# Altium PCB board.PcbDoc
Units mm, origin at the board's own origin, x right, y up, seen from the top; angles counter-clockwise.
Board outline 40 x 30 mm, 2 copper layers (Top Layer, Bottom Layer), stack 0.97 mm thick; 50 components, 33 nets, 139 pads, 29 vias.
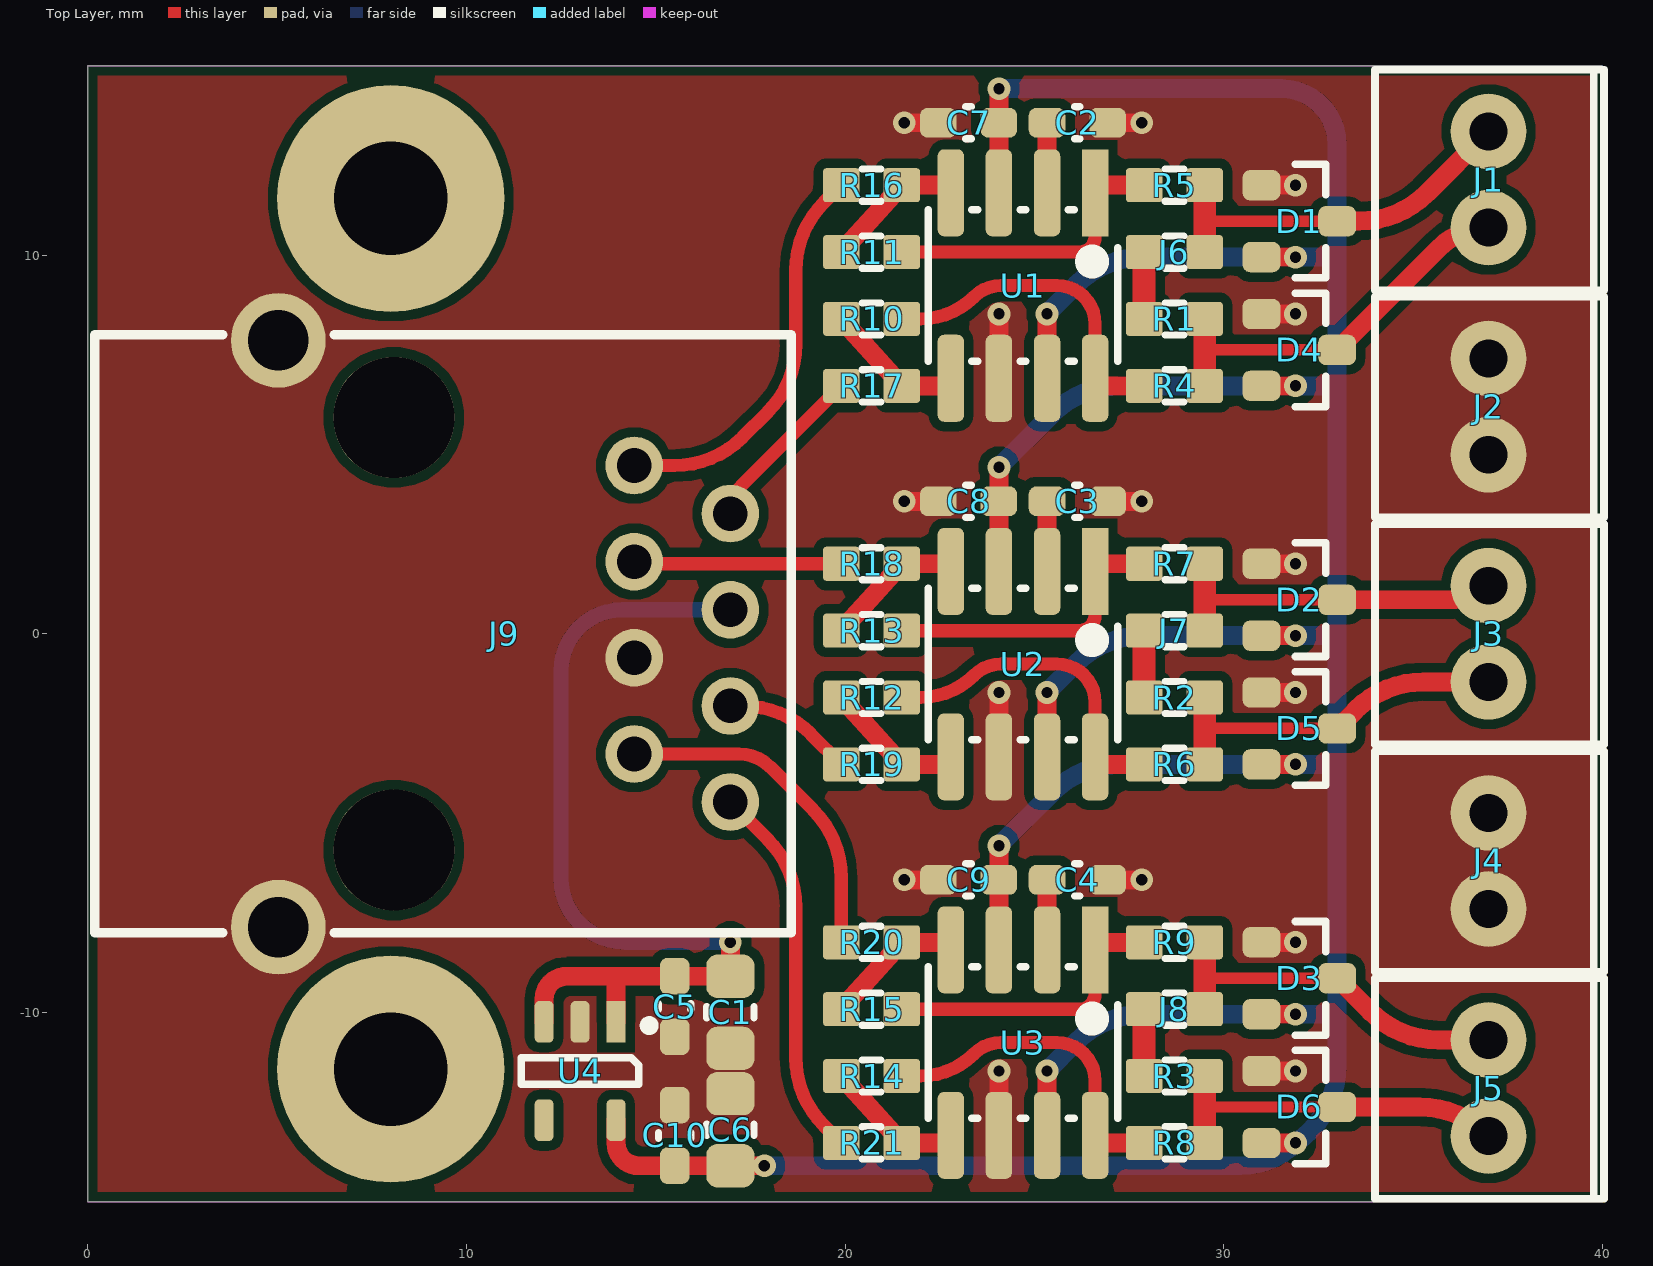
[diagram p0: Top Layer view]
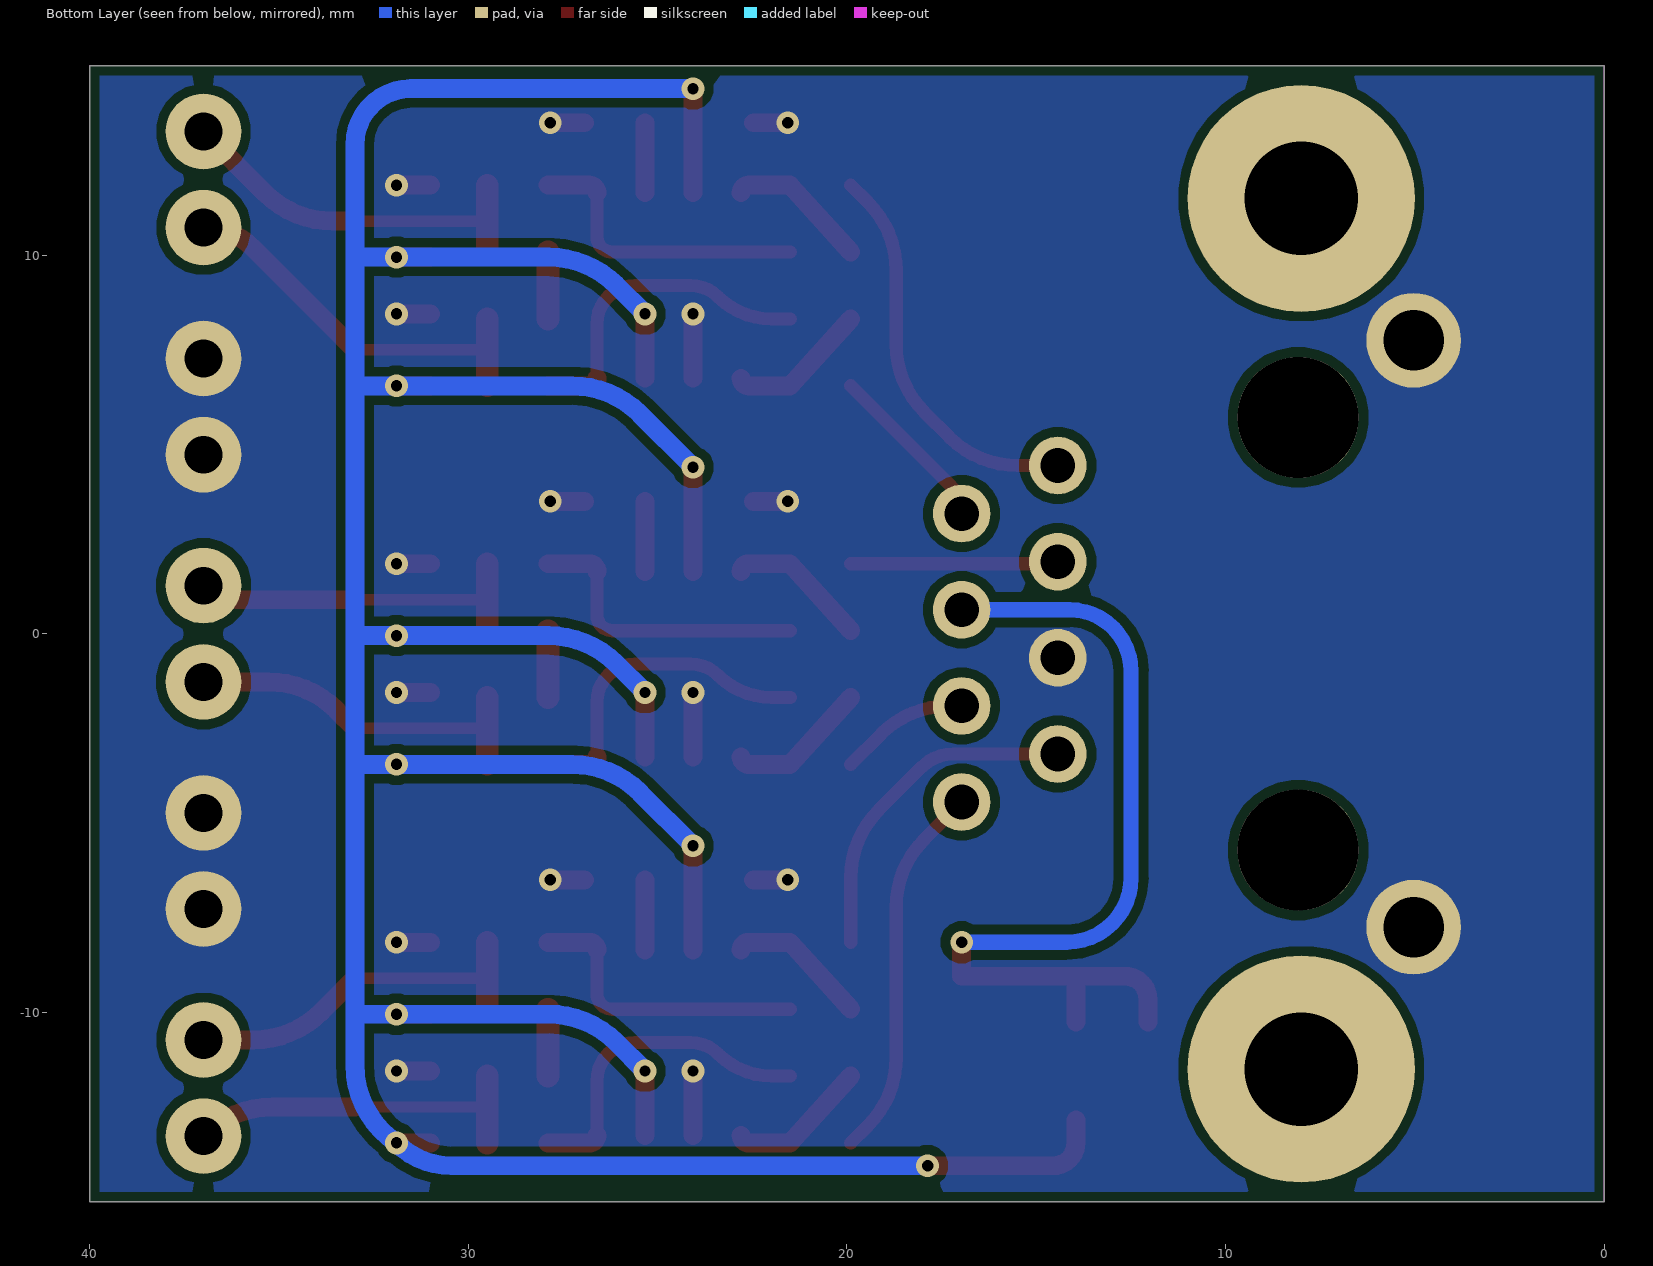
[diagram p1: Bottom Layer view, seen from below]
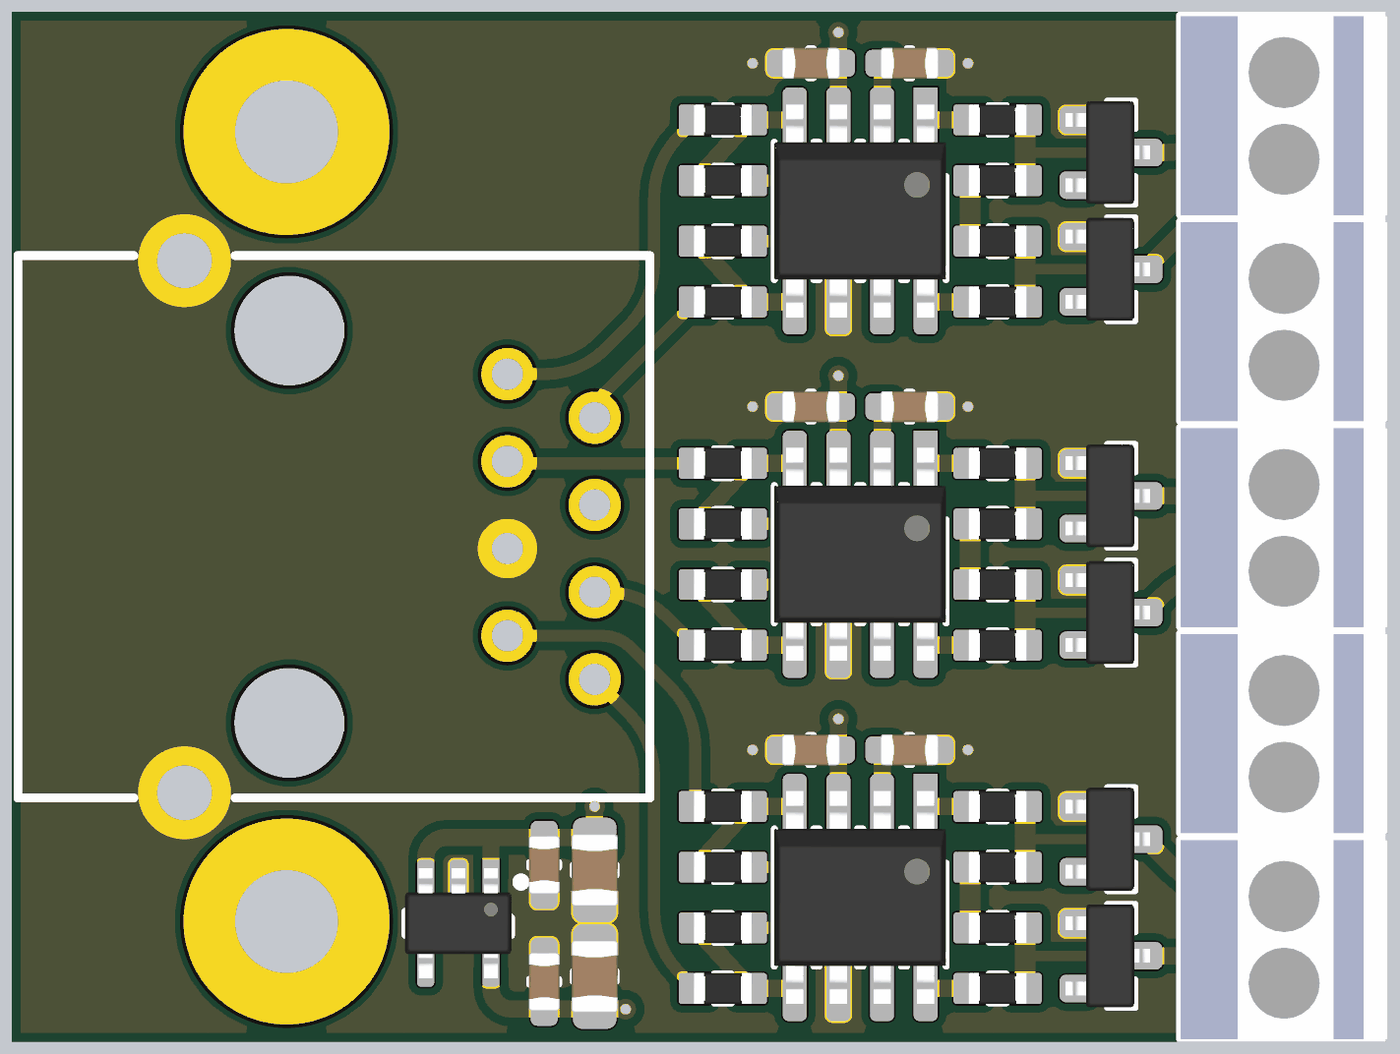
[diagram p2: 3D render of the assembled board from above, using the file's embedded part models]

## Layer stack, top to bottom
Top Solder: solder mask 0.0127, Solder Resist, Dk 3.8
Top Layer: signal copper 0.035
Dielectric: core 0.9, FR-4, Dk 4.5
Bottom Layer: signal copper 0.035
Bottom Solder: solder mask 0.0127, Solder Resist, Dk 3.8

## Board outline
0,-15 0,15 40,15 40,-15

## Design rules (kind name [scope] priority, off if disabled: settings)
AcuteAngle [All] p1: minimum=6.00000000000000E+0001 checktracksonly=FALSE
Clearance Clearance_1 [InNetClass('220') vs InNetClass('220')] p1: gap=1.2 ignorepadtopadclearanceinfootprint=FALSE
Clearance [All] p2: gap=0.25 ignorepadtopadclearanceinfootprint=FALSE except(0.13: Arc-Arc Arc-Track Arc-SMDPad Arc-Via Track-Track Track-SMDPad Track-Via SMDPad-SMDPad SMDPad-Via THPad-Via Via-Via; 0.15: Arc-THPad Arc-Text Arc-Hole Track-THPad Track-Text Track-Hole SMDPad-THPad SMDPad-Text SMDPad-Hole THPad-THPad THPad-Text THPad-Hole Via-Text Via-Hole Fill-Text Fill-Hole Poly-Text Poly-Hole Region-Text Region-Hole Text-Text Text-Hole)
ComponentClearance ComponentClearance_1 [HasFootprint('RJ45-TH_R-RJ45R10P-B000')] p1: gap=-1 collisioncheckmode=3 verticalgap=2540 showdistances=FALSE
ComponentClearance ComponentClearance_2 [HasFootprint('TP_TH_MICRO')] p2: gap=-1 collisioncheckmode=3 verticalgap=2540 showdistances=FALSE
ComponentClearance ComponentClearance_3 [HasFootprint('CONN_DG308-2.54-2P') vs HasFootprint('CONN_DG308-2.54-2P')] p3: gap=-1 collisioncheckmode=3 verticalgap=2540 showdistances=FALSE
ComponentClearance [All] p4: gap=0.3 collisioncheckmode=3 verticalgap=0.254 showdistances=FALSE
HoleSize [All] p1: absolutevalues=TRUE maxlimit=6 minlimit=0.2 maxpercent=80.000 minpercent=20.000
HoleToHoleClearance HoleToHoleClearance_1 [IsVia vs IsThruPin] p1: gap=0.7 allowstackedmicrovias=TRUE
HoleToHoleClearance [All] p2: gap=0.5 allowstackedmicrovias=TRUE
MinimumSolderMaskSliver [All] p1 off: minsoldermaskwidth=0.254
PlaneClearance [All] p1: clearance=0.45
PlaneConnect [All] p1: planeconnectstyle=Direct reliefexpansion=0.3 reliefentries=4 reliefconductorwidth=0.381 reliefairgap=0.178
PolygonConnect [All] p1: connectstyle=Direct reliefconductorwidth=0.381 reliefentries=4 polygonreliefangle="90 Angle" airgapwidth=0.356
RoutingVias [All] p1: holewidth=0.3 width=0.6 viastyle="Through Hole" minholewidth=0.2 minwidth=0.45 maxholewidth=0.9 maxwidth=1.27
SilkToSilkClearance [All] p1 off: silktosilkclearance=0.254
SilkToSolderMaskClearance [IsPad] p1 off: minsilkscreentomaskgap=0.254 clearancetoexposedcopper=TRUE
SolderMaskExpansion [All] p1: expansion=0.102 istentingtop=FALSE
UnRoutedNet [All] p1: checkbadconnections=TRUE
Width [All] p1: maxlimit=3.81 minlimit=0.14 preferedwidth=0.254
21 further rules are at their usual default settings.

## Components (designator, comment, footprint, x,y, rotation, side; value= is the part's Value field where it differs from the comment)
C1 "10uF" C0805 16.97,-10 r90 top
C2 "100nF" C0603 26.135,13.5 r180 top
C3 "100nF" C0603 26.135,3.5 r180 top
C4 "100nF" C0603 26.135,-6.5 r180 top
C5 "100nF" C0603 15.5,-9.848 r90 top
C6 "10uF" C0805 16.97,-13.1 r270 top
C7 "100nF" C0603 23.265,13.5 r0 top
C8 "100nF" C0603 23.265,3.5 r0 top
C9 "100nF" C0603 23.265,-6.5 r0 top
C10 "100nF" C0603 15.5,-13.252 r270 top
D1 "BAT54S" SOT-23 32,10.9 r180 top
D2 "BAT54S" SOT-23 32,0.9 r180 top
D3 "BAT54S" SOT-23 32,-9.1 r180 top
D4 "BAT54S" SOT-23 32,7.5 r180 top
D5 "BAT54S" SOT-23 32,-2.5 r180 top
D6 "BAT54S" SOT-23 32,-12.5 r180 top
J1 "DG308-2.54-02P-14-00A(H)" CONN_DG308-2.54-2P 37,12 r90 top
J2 "DG308-2.54-02P-14-00A(H)" CONN_DG308-2.54-2P 37,6 r90 top
J3 "DG308-2.54-02P-14-00A(H)" CONN_DG308-2.54-2P 37,0 r90 top
J4 "DG308-2.54-02P-14-00A(H)" CONN_DG308-2.54-2P 37,-6 r90 top
J5 "DG308-2.54-02P-14-00A(H)" CONN_DG308-2.54-2P 37,-12 r90 top
J6 "undef" R0603 28.7,10.083 r180 top
J7 "undef" R0603 28.7,0.083 r180 top
J8 "undef" R0603 28.7,-9.917 r180 top
J9 "R-RJ45R10P-B000" RJ45-TH_R-RJ45R10P-B000 11,0 r90 top
R1 "160" R0603 28.7,8.317 r0 top
R2 "160" R0603 28.7,-1.683 r0 top
R3 "160" R0603 28.7,-11.683 r0 top
R4 "1k" R0603 28.7,6.55 r180 top
R5 "1k" R0603 28.7,11.85 r180 top
R6 "1k" R0603 28.7,-3.45 r180 top
R7 "1k" R0603 28.7,1.85 r180 top
R8 "1k" R0603 28.7,-13.45 r180 top
R9 "1k" R0603 28.7,-8.15 r180 top
R10 "10k" R0603 20.7,8.317 r180 top
R11 "10k" R0603 20.7,10.083 r180 top
R12 "10k" R0603 20.7,-1.683 r180 top
R13 "10k" R0603 20.7,0.083 r180 top
R14 "10k" R0603 20.7,-11.683 r180 top
R15 "10k" R0603 20.7,-9.917 r180 top
R16 "49.9" R0603 20.7,11.85 r180 top
R17 "49.9" R0603 20.7,6.55 r180 top
R18 "49.9" R0603 20.7,1.85 r180 top
R19 "49.9" R0603 20.7,-3.45 r180 top
R20 "49.9" R0603 20.7,-8.15 r180 top
R21 "49.9" R0603 20.7,-13.45 r180 top
U1 "THS4531IDR" SO-8 24.7,9.2 r180 top
U2 "THS4531IDR" SO-8 24.7,-0.8 r180 top
U3 "THS4531IDR" SO-8 24.7,-10.8 r180 top
U4 "TLV70033DDCR" SOT-23-5 13,-11.55 r90 top

## Footprints (in the part's own frame and the unit in brackets; to place one, negate y for a bottom-side part, rotate by r counter-clockwise, add the part's x,y. Pads: shape width x height; smd on the part's side, far side on the other; paste and mask are expansions set on the pad)
C0603 [mil] "Chip Capacitor"
  rrect50% 38x31 smd mask+1.97: 1(-31.5,0) 2(31.5,0)
  silkscreen extent -3,-17 3,17, body extent -33,-18 33,18, height 35
C0805 [mil] "Chip Capacitor"
  rrect50% 45x50 smd mask+1.97: 1(-37.5,0) 2(37.5,0)
  silkscreen extent -6,-25 6,25, body extent -41,-27 41,27, height 53
CONN_DG308-2.54-2P [mm]
  round 2 hole 1 mask+0: 1(1.27,0) 2(-1.27,0)
  silkscreen extent -2.92,-3.05 2.9,3, body extent -2.92,-3.05 2.88,2.97, height 7.83
R0603 [mil] "Chip Resistor; Body 1.6 x 0.8 mm (LxW typ)"
  rrect20% 38x35.43 smd mask+1.97: 1(-31.5,0) 2(31.5,0)
  silkscreen extent -10,-17 10,17, body extent -33,-18 33,18, height 22
RJ45-TH_R-RJ45R10P-B000 [mm]
  round 1.524 hole 0.914: 1(4.445,-3.43) 2(3.175,-5.97) 3(1.905,-3.43) 4(0.635,-5.97) 5(-0.635,-3.43) 6(-1.905,-5.97) 7(-3.175,-3.43) 8(-4.445,-5.97)
  round 2.5 hole 1.6: 9(7.75,5.97) 10(-7.75,5.97)
  round 3.2 hole 3.2 unplated: ""(-5.715,2.92) ""(5.715,2.92)
  silkscreen extent -7.9,-7.58 7.9,10.82
SO-8 [mm] "SOIC, 8-Leads, Body 4.9x3.9mm, Pitch 1.27mm, IPC Low Density"
  rect 0.7x2.3 smd mask+0.05: 1(-1.905,-2.45)
  rrect50% 0.7x2.3 smd mask+0.05: 2(-0.635,-2.45) 3(0.635,-2.45) 4(1.905,-2.45) 5(1.905,2.45) 6(0.635,2.45) 7(-0.635,2.45) 8(-1.905,2.45)
  silkscreen extent -2.5,-2 2.5,2, body extent -2.5,-3.1 2.5,3.1, height 1.75
SOT-23 [mm]
  rrect50% 1x0.8 smd mask+0.05: 1(1,-0.95) 2(1,0.95) 3(-1,0)
  silkscreen extent -0.7,-1.5 0.1,1.5, body extent -1.27,-1.5 1.33,1.5, height 1.1
SOT-23-5 [mm]
  rect 1.1x0.5 smd mask+0.05: 1(1.3,-0.95)
  rrect50% 1.1x0.5 smd mask+0.05: 2(1.3,0) 3(1.3,0.95) 4(-1.3,0.95) 5(-1.3,-0.95)
  silkscreen extent -0.35,-1.95 1.32,1.55, body extent -1.6,-1.55 1.6,1.55, height 1.45

## Part data
C1 C6: library part CAP, "10uf 50V 1206"
C2 C3 C4 C5 C7 C8 C9 C10: library part CAP, "100nF 0603"
D1 D2 D3 D4 D5 D6: library part BAT54S_C916425
J1 J2 J3 J4 J5: library part "CONN MOLEX HDR-M 1x4"
J6 J7 J8: library part R0201
R1 R2 R3: library part R0201, "160R 0603"
R4 R5 R6 R7 R8 R9: library part R0201, "1k 0603"
R10 R11 R12 R13 R14 R15: library part R0201, "10k 0603"
R16 R17 R18 R19 R20 R21: library part R0201, "49.9R"

## Free pads (board coordinates)
  round 6 hole 3: M(8,-11.5) M(8,11.5)

## Via types
v1: diameter 0.6, hole 0.3, Top Layer to Bottom Layer, tented both sides, 29 vias

## Nets (pads, with @x,y where several pads share a name; then routed paths per layer and width w, separated by ;. In a path a pad name is that pad's centre, name@x,y a point inside that pad or via, vN(x,y) a via of type N, cw(c..) or ccw(c..) an arc to the next point about the centre after c; other vN are vias at no path point)
3V3: C6.2 C7.2 C8.2 C9.2 C10.2 D1.2 D2.2 D3.2 D4.2 D5.2 D6.2 U1.3 U1.7 U2.3 U2.7 U3.3 U3.7 U4.5 | length 118.3
  Top Layer w0.5: U4.5 13.95,-13.451 ccw(c14.551,-13.451) 14.551,-14.052 C10.2 C6.2 v1(17.87,-14.052) ; U3.3 C9.2 v1(24.065,-5.6) ; U2.3 C8.2 v1(24.065,4.4) ; U1.3 C7.2 v1(24.065,14.4) ; U3.7 v1(25.335,-11.55) ; U2.7 v1(25.335,-1.55) ; U1.7 v1(25.335,8.45) ; D6.2 v1(31.9,-13.45) ; D3.2 v1(31.9,-10.05) ; D5.2 v1(31.9,-3.45) ; D2.2 v1(31.9,-0.05) ; D4.2 v1(31.9,6.55) ; D1.2 v1(31.9,9.95)
  Bottom Layer w0.5: v1(17.87,-14.052) 30.445,-14.052 ccw(c30.445,-11.995) v1(31.9,-13.45) ccw(c30.522,-11.39) 33,-11.39 33,-10.05 ; v1(24.065,-5.6) 25.471,-4.194 cw(c27.267,-5.99) 27.267,-3.45 v1(31.9,-3.45) 33,-3.45 ; v1(24.065,4.4) 25.471,5.806 cw(c27.267,4.01) 27.267,6.55 v1(31.9,6.55) 33,6.55 ; v1(24.065,14.4) 31.521,14.4 cw(c31.521,12.921) 33,12.921 33,9.95 ; v1(25.335,-11.55) 26.091,-10.794 cw(c27.887,-12.59) 27.887,-10.05 v1(31.9,-10.05) 33,-10.05 ; v1(25.335,-1.55) 26.091,-0.794 cw(c27.887,-2.59) 27.887,-0.05 v1(31.9,-0.05) 33,-0.05 ; v1(25.335,8.45) 26.091,9.206 cw(c27.887,7.41) 27.887,9.95 v1(31.9,9.95) 33,9.95 ; 33,-10.05 33,-3.45 ; 33,-3.45 33,-0.05 ; 33,-0.05 33,6.55 ; 33,6.55 33,9.95
GND: C1.1 C2.1 C3.1 C4.1 C5.1 C6.1 C7.1 C8.1 C9.1 C10.1 D1.1 D2.1 D3.1 D4.1 D5.1 D6.1 J2.1 J2.2 J4.1 J4.2 J9.5 J9.9 J9.10 U1.6 U2.6 U3.6 U4.2 | length 15.9
  Top Layer w0.5: v1(21.565,-6.5) C9.1 ; v1(21.565,3.5) C8.1 ; v1(21.565,13.5) C7.1 ; U3.6 v1(24.065,-11.55) ; U2.6 v1(24.065,-1.55) ; U1.6 v1(24.065,8.45) ; C4.1 v1(27.835,-6.5) ; C3.1 v1(27.835,3.5) ; C2.1 v1(27.835,13.5) ; D6.1 v1(31.9,-11.55) ; D3.1 v1(31.9,-8.15) ; D5.1 v1(31.9,-1.55) ; D2.1 v1(31.9,1.85) ; D4.1 v1(31.9,8.45) ; D1.1 v1(31.9,11.85)
NetC1_2: C1.2 C5.2 J9.4 U4.1 U4.3 | length 24.3
  Top Layer w0.5: U4.3 12.05,-9.649 cw(c12.651,-9.649) 12.651,-9.047 13.95,-9.047 ; U4.1 13.95,-9.047 ; v1(16.97,-8.147) C1.2 C5.2 13.95,-9.047
  Bottom Layer w0.4: v1(16.97,-8.147) 14.192,-8.147 cw(c14.192,-6.449) 12.493,-6.449 12.493,-0.991 cw(c14.119,-0.991) 14.119,0.635 J9.4
NetC2_2: C2.2 U1.2 | length 1.8
  Top Layer w0.5: U1.2 C2.2
NetC3_2: C3.2 U2.2 | length 1.8
  Top Layer w0.5: U2.2 C3.2
NetC4_2: C4.2 U3.2 | length 1.8
  Top Layer w0.5: U3.2 C4.2
NetD1_3: D1.3 J1.1 J6.1 R5.1 | length 10.2
  Top Layer w0.3: 29.5,10.967 ccw(c29.661,11.128) 29.661,10.9 D1.3
  Top Layer w0.5: D1.3 33.578,10.9 ccw(c33.578,13.44) 35.374,11.644 J1.1
  Top Layer w0.6: J6.1 29.5,10.967 R5.1
NetD2_3: D2.3 J3.1 J7.1 R7.1 | length 9.4
  Top Layer w0.3: 29.5,0.967 ccw(c29.661,1.128) 29.661,0.9 D2.3
  Top Layer w0.5: D2.3 36.107,0.9 ccw(c36.107,2.163) J3.1
  Top Layer w0.6: J7.1 29.5,0.967 R7.1
NetD3_3: D3.3 J5.1 J8.1 R9.1 | length 9.9
  Top Layer w0.3: 29.5,-9.033 ccw(c29.661,-8.872) 29.661,-9.1 D3.3
  Top Layer w0.5: D3.3 33.886,-9.986 ccw(c35.682,-8.19) 35.682,-10.73 J5.1
  Top Layer w0.6: J8.1 29.5,-9.033 R9.1
NetD4_3: D4.3 J1.2 R1.2 R4.1 | length 10.5
  Top Layer w0.3: 29.5,7.5 D4.3
  Top Layer w0.5: D4.3 35.686,10.186 cw(c37,8.871) J1.2
  Top Layer w0.6: R4.1 29.5,7.5 R1.2
NetD5_3: D5.3 J3.2 R2.2 R6.1 | length 9.7
  Top Layer w0.3: 29.5,-2.5 D5.3
  Top Layer w0.5: D5.3 33.486,-2.014 cw(c35.282,-3.81) 35.282,-1.27 J3.2
  Top Layer w0.6: R6.1 29.5,-2.5 R2.2
NetD6_3: D6.3 J5.2 R3.2 R8.1 | length 9.5
  Top Layer w0.3: 29.5,-12.5 D6.3
  Top Layer w0.5: D6.3 35.178,-12.5 cw(c35.178,-15.04) 36.974,-13.244 J5.2
  Top Layer w0.6: R8.1 29.5,-12.5 R3.2
NetJ6_2: J6.2 R1.1 | length 1.8
  Top Layer w0.6: R1.1 J6.2
NetJ7_2: J7.2 R2.1 | length 1.8
  Top Layer w0.6: R2.1 J7.2
NetJ8_2: J8.2 R3.1 | length 1.8
  Top Layer w0.6: R3.1 J8.2
NetJ9_1: J9.1 R16.2 | length 10.6
  Top Layer w0.35: J9.1 15.493,4.445 ccw(c15.493,6.985) 17.289,5.189 17.956,5.856 ccw(c16.16,7.652) 18.7,7.652 18.7,9.598 cw(c21.24,9.598) 19.444,11.394 R16.2
NetJ9_2: J9.2 R17.2 | length 4.5
  Top Layer w0.35: J9.2 cw(c18.045,3.175) 17.285,3.935 R17.2
NetJ9_3: J9.3 R18.2 | length 5.5
  Top Layer w0.35: J9.3 ccw(c14.563,2.038) 14.563,1.85 R18.2
NetJ9_6: J9.6 R19.2 | length 3.5
  Top Layer w0.35: J9.6 17.303,-1.905 cw(c17.303,-4.445) 19.099,-2.649 R19.2
NetJ9_7: J9.7 R20.2 | length 9
  Top Layer w0.35: J9.7 17.194,-3.175 cw(c17.194,-4.343) 18.02,-3.517 19.156,-4.653 cw(c17.36,-6.449) 19.9,-6.449 R20.2
NetJ9_8: J9.8 R21.2 | length 10
  Top Layer w0.35: J9.8 17.956,-5.431 cw(c16.16,-7.227) 18.7,-7.227 18.7,-11.198 ccw(c21.24,-11.198) 19.444,-12.994 R21.2
NetR4_2: R4.2 R10.1 U1.8 | length 8.8
  Top Layer w0.35: R10.1 21.992,8.317 ccw(c21.992,10.308) 23.4,8.9 cw(c24.124,8.176) 24.124,9.2 25.6,9.2 cw(c25.6,8.195) 26.605,8.195 U1.8
  Top Layer w0.5: U1.8 ccw(c26.805,6.75) 26.805,6.55 R4.2
NetR5_2: R5.2 R11.1 U1.1 | length 7.9
  Top Layer w0.35: R11.1 26.194,10.083 ccw(c26.194,10.495) 26.605,10.495 U1.1
  Top Layer w0.5: U1.1 cw(c26.805,11.65) 26.805,11.85 R5.2
NetR6_2: R6.2 R12.1 U2.8 | length 8.8
  Top Layer w0.35: R12.1 21.992,-1.683 ccw(c21.992,0.308) 23.4,-1.1 cw(c24.124,-1.824) 24.124,-0.8 25.6,-0.8 cw(c25.6,-1.805) 26.605,-1.805 U2.8
  Top Layer w0.5: U2.8 ccw(c26.805,-3.25) 26.805,-3.45 R6.2
NetR7_2: R7.2 R13.1 U2.1 | length 7.9
  Top Layer w0.35: R13.1 26.194,0.083 ccw(c26.194,0.495) 26.605,0.495 U2.1
  Top Layer w0.5: U2.1 cw(c26.805,1.65) 26.805,1.85 R7.2
NetR8_2: R8.2 R14.1 U3.8 | length 8.8
  Top Layer w0.35: R14.1 21.992,-11.683 ccw(c21.992,-9.692) 23.4,-11.1 cw(c24.124,-11.824) 24.124,-10.8 25.6,-10.8 cw(c25.6,-11.805) 26.605,-11.805 U3.8
  Top Layer w0.5: U3.8 ccw(c26.805,-13.25) 26.805,-13.45 R8.2
NetR9_2: R9.2 R15.1 U3.1 | length 7.9
  Top Layer w0.35: R15.1 26.194,-9.917 ccw(c26.194,-9.505) 26.605,-9.505 U3.1
  Top Layer w0.5: U3.1 cw(c26.805,-8.35) 26.805,-8.15 R9.2
NetR10_2: R10.2 R17.1 U1.5 | length 3.8
  Top Layer w0.5: R10.2 R17.1 22.595,6.55 ccw(c22.595,6.75) U1.5
NetR11_2: R11.2 R16.1 U1.4 | length 3.8
  Top Layer w0.5: R11.2 R16.1 22.595,11.85 cw(c22.595,11.65) U1.4
NetR12_2: R12.2 R19.1 U2.5 | length 3.8
  Top Layer w0.5: R12.2 R19.1 22.595,-3.45 ccw(c22.595,-3.25) U2.5
NetR13_2: R13.2 R18.1 U2.4 | length 3.8
  Top Layer w0.5: R13.2 R18.1 22.595,1.85 cw(c22.595,1.65) U2.4
NetR14_2: R14.2 R21.1 U3.5 | length 3.8
  Top Layer w0.5: R14.2 R21.1 22.595,-13.45 ccw(c22.595,-13.25) U3.5
NetR15_2: R15.2 R20.1 U3.4 | length 3.8
  Top Layer w0.5: R15.2 R20.1 22.595,-8.15 cw(c22.595,-8.35) U3.4
pads on no net: J9. U4.4

## Polygon pours and split planes (outlines as drawn)
GND on Bottom Layer "NONET_L02_P-001" (solid, remove dead copper, pour order 1): -2.5,17.5 -2.5,-17.5 42.5,-17.5 42.5,17.5
GND on Top Layer "NONET_L02_P-001" (solid, remove dead copper, pour order 0): -2.5,17.5 -2.5,-17.5 42.5,-17.5 42.5,17.5

## Keep-outs
Keep-Out Layer:
  the board outline again, w0